# Allegro board PCB EDITOR TUTORIAL_COMPLETE.brd

Outline 100 x 50 mm; copper layers: TOP, POWER PLANE, BOTTOM. Coordinates in mm from the lower left corner of the outline.
Outline path: rectangle 0,0 100,50

## Design rules (mm)
constraint set DEFAULT: min track width 0.127
net group DPD: nets D+ D-

## Placement (name value [footprint] x y rotation side)
C1  10uF  [0402-CAP]  4.65 24 180 top
C2  100uF  [1210]  4 13.35 90 top
C3  10uF  [0402-CAP]  28.65 24 180 top
C4  0.1uF  [0402-CAP]  3.35 21 0 top
C5  0.1uF  [0402-CAP]  3.35 18 0 top
C6  0.1uF  [0402-CAP]  2 36 90 top
C7  0.1uF  [0402-CAP]  28 21 270 top
C8  0.1uF  [0402-CAP]  4.65 36 90 top
C9  10uF  [0402-CAP]  8.81 25 90 top
IC1  PIC32MX440F512H  [SQFP-S-10X10-64]  18.29 25 90 top
JP2  PIC 32 PROG  [1X06_LOCK]  11.81 15 0 top
JP9  -  [XTEND-DIGI-MODEM]  64 25 0 top
MAIN_PWR  RED  [LED_LNJ]  18.29 5 90 top
NOREF  -  []  -18 -61 0 top
NOREF#2  -  [unnamed#2]  4 4 0 top
NOREF#3  -  []  100 0 90 top
NOREF#4  -  []  0 0 0 top
NOREF#5  -  [unnamed#2]  96 46 0 top
NOREF#6  -  []  0 0 0 top
NOREF#7  -  []  0 50 0 top
NOREF#8  -  [unnamed#2]  4 46 0 top
NOREF#9  -  [unnamed#2]  96 4 0 top
R1  150  [0402-RES]  15.54 5 90 top
R2  56k  [0402-RES]  28.65 17 0 top
U1  LT1965  [MSOP-8_MS]  4.21 29 0 top
X1  USB-B  [USB-MICROB]  19.34 45 180 top
Y1  8MHz  [CRYSTAL-SMD-5X3]  12 35.5 270 top

## Library data of the parts
C1-C9 = CAP
IC1 = PIC32MX440F512H
JP2 = M06_LOCK
JP9 = XTEND-DIGI-MODEM
MAIN_PWR = LED: Tolerance: TOL
R1 R2 = RESISTOR
U1 = LT1965
X1 = USB-MicroB
Y1 = CRYSTAL

## Footprints (pads in the part's own frame, mm; a bottom-side part is the same pattern mirrored in y, then rotated)
1X06_LOCK
  round 1.88 hole 1.016: 1(0,0) 2(2.54,-0.254) 3(5.08,0) 4(7.62,-0.254) 5(10.16,0) 6(12.7,-0.254)
0402-CAP
  rect 0.7x0.9 smd: 1(-0.65,0) 2(0.65,0)
0402-RES
  rect 0.7x0.9 smd: 1(-0.65,0) 2(0.65,0)
1210
  rect 1.2x2 smd: 1(-1.6,0) 2(1.6,0)
CRYSTAL-SMD-5X3
  rect 1.1x1.9 smd: 1(-1.15,1.85) 2(-1.15,-1.85) 3(1.15,-1.85) 4(1.15,1.85)
LED_LNJ
  rect 0.445x0.95 smd: 1(-0.652,0) 2(0.652,0)
MSOP-8_MS
  rect 1.397x0.432 smd: 1(-2.21,0.975) 2(-2.21,0.325) 3(-2.21,-0.325) 4(-2.21,-0.975) 5(2.21,-0.975) 6(2.21,-0.325) 7(2.21,0.325) 8(2.21,0.975)
SQFP-S-10X10-64
  rect 1.6x0.295 smd: 1(-5.6,3.75) 2(-5.6,3.25) 3(-5.6,2.75) 4(-5.6,2.25) 5(-5.6,1.75) 6(-5.6,1.25) 7(-5.6,0.75) 8(-5.6,0.25) 9(-5.6,-0.25) 10(-5.6,-0.75) 11(-5.6,-1.25) 12(-5.6,-1.75) 13(-5.6,-2.25) 14(-5.6,-2.75) 15(-5.6,-3.25) 16(-5.6,-3.75) 33(5.6,-3.75) 34(5.6,-3.25) 35(5.6,-2.75) 36(5.6,-2.25) 37(5.6,-1.75) 38(5.6,-1.25) 39(5.6,-0.75) 40(5.6,-0.25) 41(5.6,0.25) 42(5.6,0.75) 43(5.6,1.25) 44(5.6,1.75) 45(5.6,2.25) 46(5.6,2.75) 47(5.6,3.25) 48(5.6,3.75)
  rect 0.295x1.6 smd: 17(-3.75,-5.6) 18(-3.25,-5.6) 19(-2.75,-5.6) 20(-2.25,-5.6) 21(-1.75,-5.6) 22(-1.25,-5.6) 23(-0.75,-5.6) 24(-0.25,-5.6) 25(0.25,-5.6) 26(0.75,-5.6) 27(1.25,-5.6) 28(1.75,-5.6) 29(2.25,-5.6) 30(2.75,-5.6) 31(3.25,-5.6) 32(3.75,-5.6) 49(3.75,5.6) 50(3.25,5.6) 51(2.75,5.6) 52(2.25,5.6) 53(1.75,5.6) 54(1.25,5.6) 55(0.75,5.6) 56(0.25,5.6) 57(-0.25,5.6) 58(-0.75,5.6) 59(-1.25,5.6) 60(-1.75,5.6) 61(-2.25,5.6) 62(-2.75,5.6) 63(-3.25,5.6) 64(-3.75,5.6)
unnamed#2
  round 4.064 hole 3.81: (0,0)
USB-MICROB
  rect 0.35x1.4 smd: D+(0,2.65) D-(-0.65,2.65) GND(1.3,2.65) ID(0.65,2.65) VBUS(-1.3,2.65)
  rect 1.8x1.9 smd: MT1(-3.8,0) MT2(3.8,0)
  rect 2.1x1.6 smd: MT3(-3.1,2.55) MT4(3.1,2.55)
  rect 1.9x1.9 smd: P_1(-1.2,0) P_2(1.2,0)
XTEND-DIGI-MODEM
  round 0 hole 3.3 unplated: (-26.5,14.5) (-26.5,-14.5) (26.5,14.5) (26.5,-14.5)
  round 1.422 hole 0.7: 1(-27.5,9) 2(-25.5,9) 3(-27.5,7) 4(-25.5,7) 5(-27.5,5) 6(-25.5,5) 7(-27.5,3) 8(-25.5,3) 9(-27.5,1) 10(-25.5,1) 11(-27.5,-1) 12(-25.5,-1) 13(-27.5,-3) 14(-25.5,-3) 15(-27.5,-5) 16(-25.5,-5) 17(-27.5,-7) 18(-25.5,-7) 19(-27.5,-9) 20(-25.5,-9)

## Nets
3.3V: C2.1 C4.1 C5.1 C6.1 C7.1 C8.1 IC1.10 IC1.19 IC1.26 IC1.35 IC1.38 JP2.2 R1.1 R2.1 U1.1 U1.2(OUT_1) U1.3
GND: C1.2 C2.2 C3.2 C4.2 C5.2 C6.2 C7.2 C8.2 C9.2 IC1.9 IC1.20 IC1.25 IC1.41 JP2.3 JP9.1 MAIN_PWR.1(CATHODE) U1.4 U1.5 X1.GND Y1.2 Y1.4(GND_4)
VBUS: C1.1 IC1.34 JP9.2(VCC) U1.6 U1.7 U1.8 X1.VBUS
CTS: IC1.21 JP9.9
D+: IC1.37 X1.D+
D-: IC1.36 X1.D-
PROG0: IC1.17 JP2.5
PROG1: IC1.18 JP2.4
RESET: IC1.7(_MCLR) JP2.1
RTS: IC1.29 JP9.10
SHDN: IC1.59 JP9.7
URX: IC1.31 JP9.6
UTX: IC1.32 JP9.5
N01360: MAIN_PWR.2 R1.2
N01559: C3.1 JP9.11 R2.2
N01622: IC1.39 Y1.1
N01634: IC1.40 Y1.3
N01671: C9.1 IC1.56

Pads without a net: IC1 1 2 3 4 5 6 8 11 12 13 14 15 16 22 23 24 27 28 30 33 42 43 44 45 46 47 48 49 50 51 52 53 54 55 57 58 60 61 62 63 64; JP2 6; JP9 3 4 8 12 13 14 15 16 17 18 19 20; X1 ID MT1 MT2 MT3 MT4 P_1 P_2

## Via types
v1: diameter 0.61, hole 0.33, TOP to BOTTOM, 33 vias

## Routing (per net, layer and track width the routed paths; a pad name or vN(x,y) marks a point on that pad's centre or on a via; arc(x,y) is an arc through that point)
3.3V: length 20.7
  TOP w0.28: IC1.26 v1(22.15,25.75) ; IC1.10 v1(19.04,20.8) ; IC1.35 v1(21.04,31.83) ; IC1.19 v1(22.15,22.25) ; IC1.38 v1(19.54,31.83)
  TOP w0.381: C5.1 v1(1.92,18) ; C7.1 v1(28,22.43) ; v1(0.87,29.98) U1.1 U1.2 U1.3 ; C4.1 v1(1.92,21) ; C2.1 v1(4,10.71) ; R2.1 v1(27.22,17) ; C6.1 v1(2,34.57) ; R1.1 v1(15.54,3.57) ; C8.1 v1(4.65,34.57)
  POWER PLANE w0.381: 13.23,14.75 JP2.2 ; JP2.2 14.35,13.63 ; JP2.2 15.47,14.75 ; JP2.2 14.35,15.87
GND: length 27.2
  TOP w0.28: IC1.20 v1(25.12,22.75) ; IC1.25 v1(25.66,25.25) ; IC1.41 v1(18.04,31.83) ; IC1.9 v1(18.54,18.17)
  TOP w0.381: C7.2 v1(28,19.57) ; C8.2 v1(4.65,37.43) ; C4.2 v1(4.78,21) ; C1.2 v1(3.22,24) ; U1.4 v1(0.87,28.02) ; Y1.4 v1(15.23,34.35) ; U1.5 v1(7.55,28.02) ; X1.GND v1(18.04,41.22) ; C2.2 v1(4,15.98) ; C3.2 v1(27.22,24) ; Y1.2 v1(10.15,37.63) ; MAIN_PWR.1 v1(18.29,3.69) ; C6.2 v1(2,37.43) ; C5.2 v1(4.78,18) ; C9.2 v1(8.81,26.43)
  BOTTOM w0.381: 16.89,13.89 JP2.3 ; JP2.3 15.77,15 ; JP2.3 16.89,16.12 ; JP2.3 18.01,15 ; JP9.1 37.39,34 ; JP9.1 36.5,34.89 ; JP9.1 36.5,33.11 ; JP9.1 35.61,34
VBUS: length 52.9
  TOP w0.127: JP9.2 37.09,35.41 21.54,35.41 ; C1.1 5.3,28.44 5.53,28.68 U1.6 U1.7 U1.8 13.61,29.98 13.98,29.61 21.54,29.61 IC1.34 21.54,31.62 21.54,31.63 21.54,35.41 ; 21.54,35.41 21.54,39.83 20.64,40.73 X1.VBUS
CTS: length 13.7
  TOP w0.127: IC1.21 25.23,23.25 27.98,26 JP9.9
D+: length 12
  TOP w0.127: X1.D+ 19.34,34.33 20.04,33.63 IC1.37
D-: length 12.3
  TOP w0.127: IC1.36 20.54,31.59 20.29,31.84 20.29,33.74 19.59,34.44 19.59,41.06 19.99,41.46 X1.D-
PROG0: length 8.9
  TOP w0.127: JP2.5 21.97,16.25 25.4,19.68 25.4,20.73 24.88,21.25 IC1.17
PROG1: length 10.2
  TOP w0.127: JP2.4 22.86,18.18 22.86,20.32 22.23,20.95 22.23,21.51 22.46,21.75 IC1.18
RESET: length 8.2
  TOP w0.127: IC1.7 17.54,18.3 16.38,17.14 13.95,17.14 JP2.1
RTS: length 15.1
  TOP w0.127: JP9.10 37.4,27.1 26.65,27.1 26.5,27.25 IC1.29
SHDN: length 63
  TOP w0.127: JP9.7 37.22,28 38.13,27.1 38.68,27.1 39.4,26.37 39.4,15.63 38.87,15.1 36.69,15.1 30.48,8.89 11.43,8.89 10.16,10.16 10.16,23.75 IC1.59
URX: length 15.3
  TOP w0.127: JP9.6 37.55,29.05 26.59,29.05 25.79,28.25 IC1.31
UTX: length 13.1
  TOP w0.127: JP9.5 26.91,30 25.66,28.75 IC1.32
N01360: length 2.8
  TOP w0.127: R1.2 MAIN_PWR.2
N01559: length 17.1
  TOP w0.127: 29.3,17.1 R2.2 ; 29.3,17.1 29.6,17.1 JP9.11 ; 29.3,17.1 C3.1
N01622: length 10.8
  TOP w0.127: Y1.1 18.36,36.65 19.04,35.98 IC1.39
N01634: length 11.1
  TOP w0.127: IC1.40 18.54,32.54 18.21,32.87 13.26,32.87 11.78,34.35 Y1.3
N01671: length 4.2
  TOP w0.127: IC1.56 10.72,25.25 9.82,24.35 C9.1

## Copper pours and planes (outline as drawn; the poured copper is in the pictures)
3.3V on POWER PLANE: 0.3,0.3 0.3,49.7 99.7,49.7 99.7,0.3
GND on BOTTOM: 0.56,0.48 0.56,49.38 99.62,49.38 99.62,0.48

## Text on the board
XSECTION_CHART: *  SURFACE | L1 TOP CONDUCTOR | *  DIELECTRIC | L2 POWER PLANE PLANE | L3 BOTTOM CONDUCTOR | DESIGN CROSS SECTION CHART | ___________________________ | TOTAL THICKNESS 0.49784 MM | 1-3
DIMENSION: FIGURE | FINISHED_SIZE | 0.3302 | 0.7 | 1.016 | 3.81 | 3.3 | DRILL CHART: TOP to BOTTOM | ALL UNITS ARE IN MILLIMETERS | PLATED | NON-PLATED | QTY | 33 | 20 | 6 | 4
